# Altium PCB PCB2.PcbDoc
Units mil, origin at the board's own origin, x right, y up, seen from the top; angles counter-clockwise.
Board outline 3937.01 x 3149.61 mil, 2 copper layers (Top Layer, Bottom Layer); 32 components, 20 nets, 109 pads, 54 vias.
Unrouted connection lines stored in the file: 5.
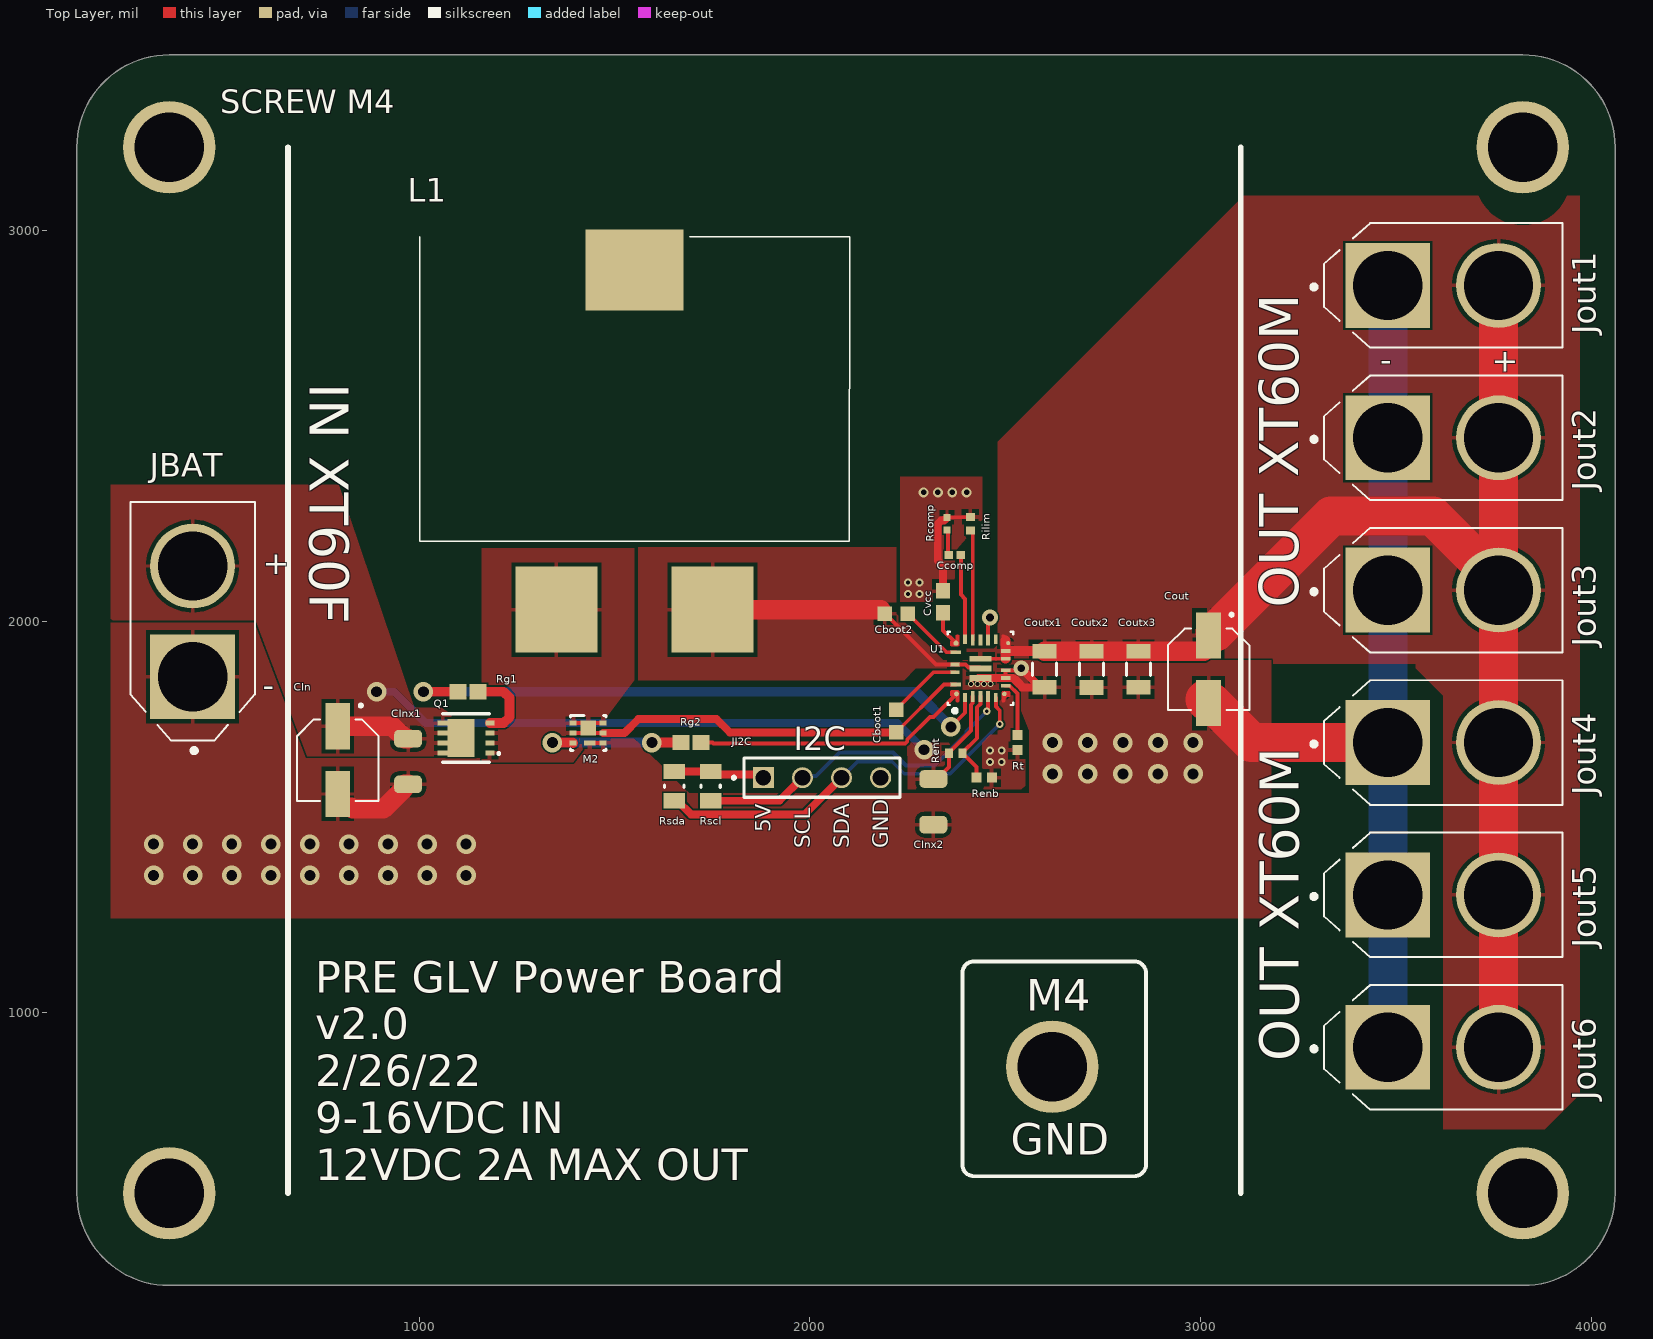
[diagram p0: Top Layer view]
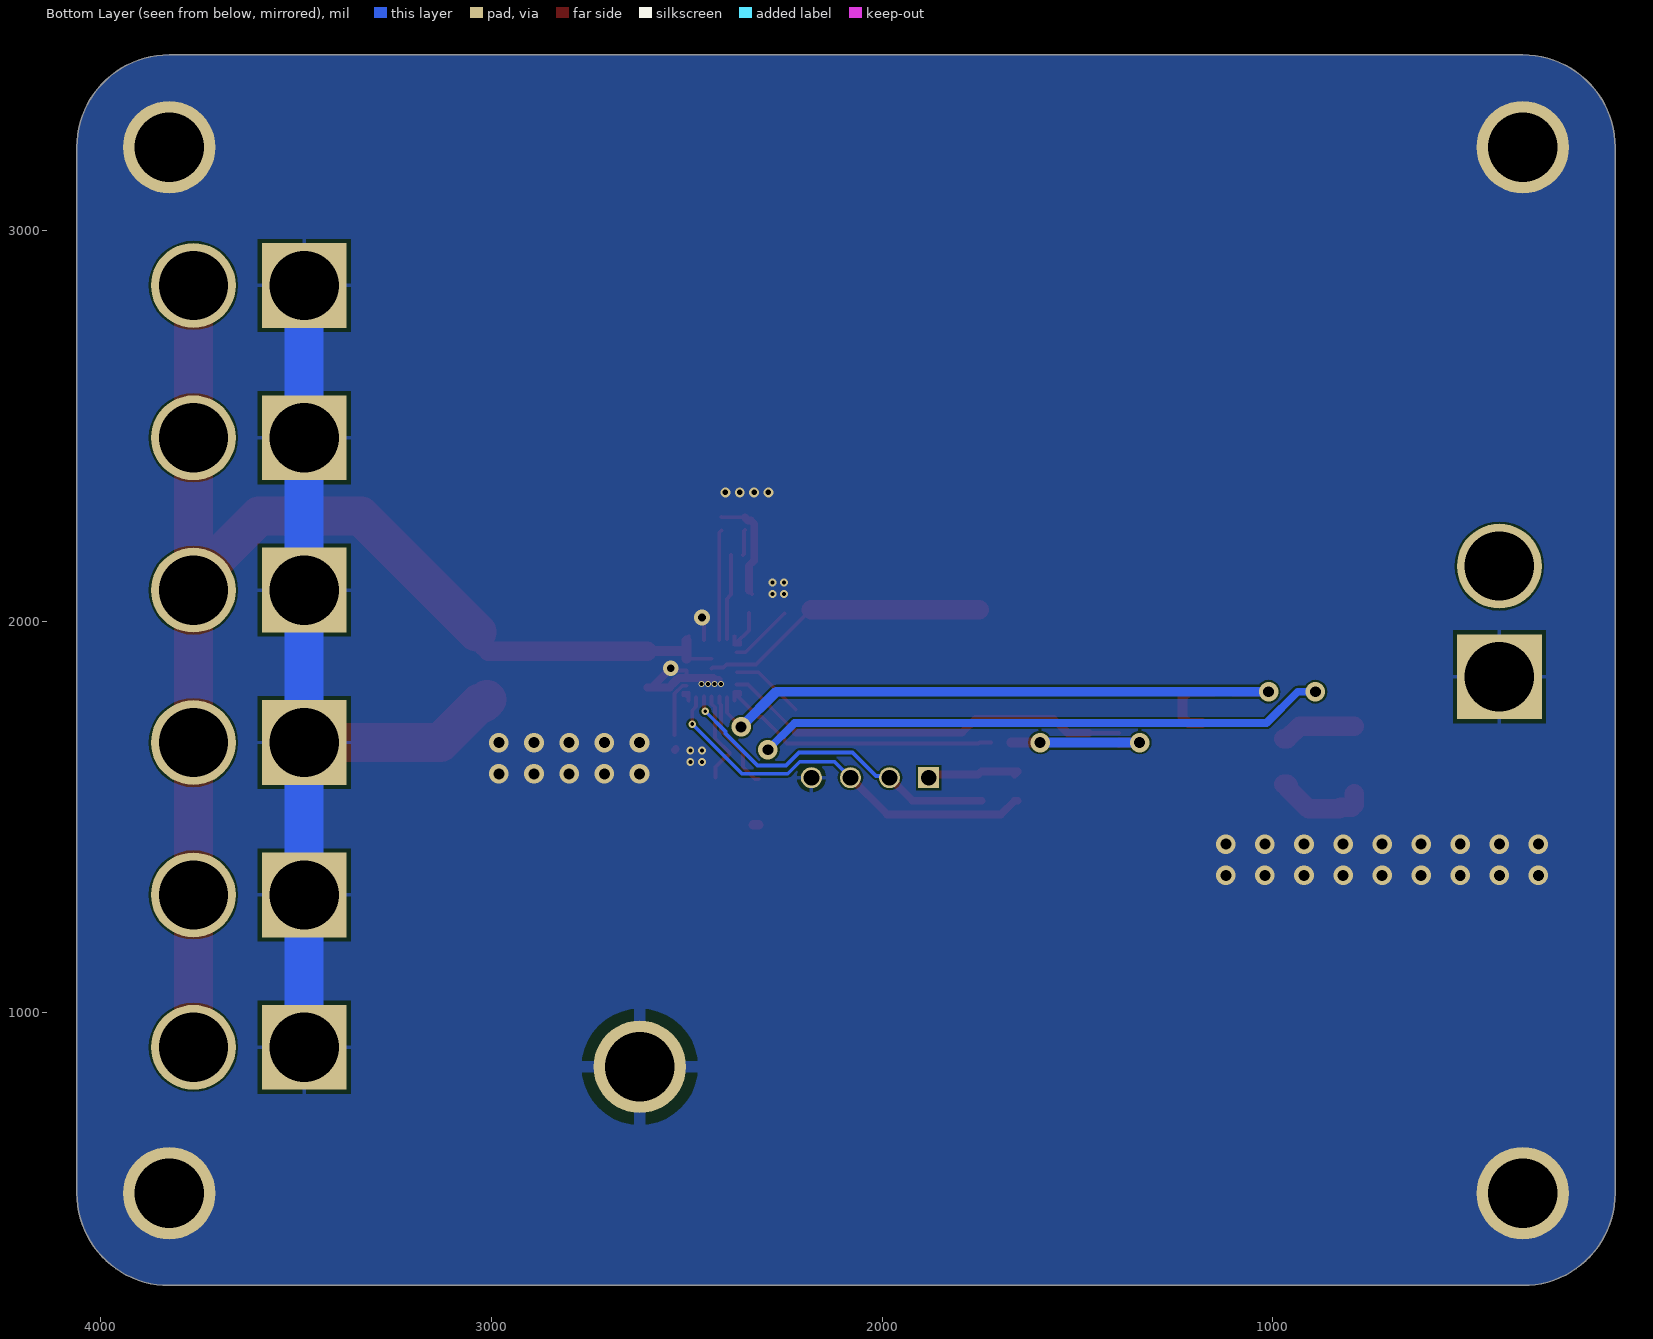
[diagram p1: Bottom Layer view, seen from below]

## Layer stack, top to bottom
Top Solder: solder mask 0.4, Solder Resist, Dk 3.5
Top Layer: signal copper 1.4
Dielectric 1: dielectric 12.6, FR-4, Dk 4.8
Bottom Layer: signal copper 1.4
Bottom Solder: solder mask 0.4, Solder Resist, Dk 3.5

## Board outline
123.7,536.61 123.7,3213.78 cw(c359.92,3213.78) 359.92,3450 3824.49,3450 cw(c3824.49,3213.78) 4060.71,3213.78 4060.71,536.61 cw(c3824.49,536.61) 3824.49,300.39 359.92,300.39 cw(c359.92,536.61)

## Design rules (kind name [scope] priority, off if disabled: settings)
Clearance Clearance_2 [(InNet('VCC') AND InComponent('Q1'))] p1: gap=5 ignorepadtopadclearanceinfootprint=TRUE except(0: Arc-Hole Track-Hole SMDPad-Hole THPad-Hole Via-Hole Fill-Hole Poly-Hole Region-Hole Text-Hole)
Clearance [All] p2: gap=5 ignorepadtopadclearanceinfootprint=FALSE except(0: Arc-Hole Track-Hole SMDPad-Hole THPad-Hole Via-Hole Fill-Hole Poly-Hole Region-Hole Text-Hole; 7.87: Arc-THPad Track-THPad; 10: Arc-Via Track-Via SMDPad-Via THPad-Via; 19.68: THPad-THPad; 20: Via-Via)
PolygonConnect PolygonConnect_1 [All vs InNet('GND')] p1: thpad.connectstyle=Relief thpad.reliefconductorwidth=10 thpad.reliefentries=4 thpad.polygonreliefangle="90 Angle" thpad.airgapwidth=10 smdpad.connectstyle=Relief smdpad.reliefconductorwidth=10 smdpad.reliefentries=4 smdpad.polygonreliefangle="90 Angle" smdpad.airgapwidth=10 via.connectstyle=Direct via.reliefconductorwidth=10 via.reliefentries=4 via.polygonreliefangle="90 Angle" via.airgapwidth=10
PolygonConnect [All] p2: thpad.connectstyle=Relief thpad.reliefconductorwidth=10 thpad.reliefentries=4 thpad.polygonreliefangle="90 Angle" thpad.airgapwidth=10 smdpad.connectstyle=Relief smdpad.reliefconductorwidth=10 smdpad.reliefentries=4 smdpad.polygonreliefangle="90 Angle" smdpad.airgapwidth=10 via.connectstyle=Direct via.reliefconductorwidth=10 via.reliefentries=4 via.polygonreliefangle="90 Angle" via.airgapwidth=10
RoutingVias [All] p1: holewidth=28 width=50 viastyle="Through Hole" minholewidth=5 minwidth=10 maxholewidth=28 maxwidth=50
SolderMaskExpansion [All] p1: expansion=4 istentingtop=FALSE
Width [All] p1: maxlimit=100 minlimit=10 preferedwidth=20 minimp=50.000000 maximp=50.000000 favimp=50.000000
30 further rules are at their usual default settings.

## Components (designator, comment, footprint, x,y, rotation, side; value= is the part's Value field where it differs from the comment)
Cboot1 "EMK107B7104KA-T" CAPC1608X90N#1 2220.71,1745 r90 top
Cboot2 "EMK107B7104KA-T" CAPC1608X90N#1 2220.71,2020 r180 top
Ccomp "GRM155R71C472KA01D" CAPC1005X55X25LL05T10 2370.71,2170 r0 top
CIn "20SVF56M" CAP_20SVF56M 791.41,1645 r270 top (schematic designator Cin)
CInx1 "GRM31CR71E475KA88L" CAP3216X125N 971.41,1641.54 r270 top (schematic designator Cinx1)
CInx2 "GRM31CR71E475KA88L" CAP3216X125N 2315.71,1538.3 r270 top (schematic designator Cinx2)
Cout "20SVF56M" CAP_20SVF56M 3020.13,1877.48 r270 top
Coutx1 "C2012X7S1E106K125AC" FP-C2012-125-IPC_A 2600.71,1877.48 r270 top
Coutx2 "C2012X7S1E106K125AC" FP-C2012-125-IPC_A 2720.71,1877.2 r270 top
Coutx3 "C2012X7S1E106K125AC" FP-C2012-125-IPC_A 2840.71,1877.48 r270 top
Cvcc "C1608X6S1C475K080AC" CAPC1608X90N#2 2340.71,2050 r270 top
JBAT "XT60-M" AMASS_XT60-M 420,2000 r90 top
JI2C "TSW-104-26-F-S" SAMTEC_TSW-104-26-F-S 1880.71,1600 r0 top
Jout1 "XT60-M" AMASS_XT60-M 3620.71,2860 r0 top
Jout2 "XT60-M" AMASS_XT60-M 3620.71,2470 r0 top
Jout3 "XT60-M" AMASS_XT60-M 3620.71,2080 r0 top
Jout4 "XT60-M" AMASS_XT60-M 3620.71,1690 r0 top
Jout5 "XT60-M" AMASS_XT60-M 3620.71,1300 r0 top
Jout6 "XT60-M" AMASS_XT60-M 3620.71,910 r0 top
L1 "PQ2614BLA-100K" PQ2614BLA100K 1551.89,2507.48 r0 top (schematic designator L?)
M2 "CSD16301Q2" DQK0006C 1432.32,1714.41 r0 top
Q1 "CSD17577Q3A" Q3A 1119.68,1701.61 r180 top
Rcomp "CRCW040247K5FKTD" RESC1005X40X25LL05T05 2350.71,2250 r270 top
Renb "CRCW0402100KFKTD" RESC1005X40X25ML05T05 2445.71,1600 r180 top
Rent "CRCW0402634KFKED" RESC1005X40N 2373.23,1662.48 r180 top
Rg1 "RC0603FR-071RL" RESC1608X55N 1125.12,1820 r180 top
Rg2 "RC0603FR-071RL" RESC1608X55N 1695.12,1690 r0 top
Rilim "RMCF0402FT21K0" RESC1005X40N 2410.71,2250 r90 top
Rscl "CRCW08054K70FKEA" FP-CRCW0805-e3-IPC_B 1745.73,1578.45 r270 top
Rsda "CRCW08054K70FKEA" FP-CRCW0805-e3-IPC_B 1652.72,1578.45 r270 top
Rt "CRCW040266K5FKED" RESC1005X40X25ML05T05 2530.71,1690 r90 top
U1 "TPS55288QRPMRQ1" RPM0026A-MFG 2436.24,1879.74 r90 top

## Footprints (in the part's own frame and the unit in brackets; to place one, negate y for a bottom-side part, rotate by r counter-clockwise, add the part's x,y. Pads: shape width x height; smd on the part's side, far side on the other; paste and mask are expansions set on the pad)
AMASS_XT60-M [mm]
  rect 5.516x5.516 hole 4.5: 1(-3.6,0)
  round 5.516 hole 4.5: 2(3.6,0)
  silkscreen extent -8.55,-4.05 7.75,4.05
CAP3216X125N [mm]
  rrect54% 1.15x1.82 smd: 1(-1.485,0) 2(1.485,0)
CAP_20SVF56M [mm]
  rect 3x1.6 smd: 1(-2.2,0) 2(2.2,0)
  silkscreen extent -3.65,-2.65 2.65,2.65, body extent -3,-2.65 3,2.65, height 5.9
CAPC1005X55X25LL05T10 [mm] "Chip Capacitor, 2-Leads, Body 1.00x0.50mm, IPC High Density"
  rect 0.56x0.52 smd: 1(-0.39,0) 2(0.39,0)
  body extent -0.53,-0.28 0.53,0.28, height 0.55
CAPC1608X90N#1 [mm]
  rect 0.95x0.93 smd: 1(-0.738,0) 2(0.738,0)
  body extent -0.8,-0.4 0.8,0.4, height 0.9
CAPC1608X90N#2 [mm]
  rect 1.01x0.93 smd: 1(-0.709,0) 2(0.709,0)
  body extent -0.8,-0.4 0.8,0.4, height 0.9
DQK0006C [mm]
  rect 0.45x0.3 smd paste+0 mask+0.051: 1(-0.975,0.65) 2(-0.975,0) 3(-0.975,-0.65) 4(0.975,-0.65) 5(0.975,0) 6(0.975,0.65)
  rect 0.75x0.3 smd paste-0.362 mask+0.051: 7(0.095,-0.65)
  rect 1x0.95 smd paste-0.487 mask+0.051: 8(0,0.325)
  silkscreen extent -1.15,-1.15 1.15,1.15, body extent 0,0 0.25,0.25, height 0.25
FP-C2012-125-IPC_A [mm]
  rect 0.956x1.556 smd paste+0 mask+0: 1(-1.175,0) 2(1.175,0)
  silkscreen extent -0.4,-0.78 0.4,0.78, body extent -2.15,-1.28 2.15,1.28, height 0.25
FP-CRCW0805-e3-IPC_B [mil]
  rect 39.63x55.44 smd paste+0 mask+0: 1(-37.44,0) 2(37.44,0)
  silkscreen extent -3,-25 3,25, body extent -67,-38 67,38, height 10
PQ2614BLA100K [mm]
  rect 5.33x5.59 smd: 1(-5.1,-12.128) 3(5.05,-12.128)
  rect 6.35x5.28 smd: 2(-0.025,9.947)
  silkscreen extent -13.98,-7.67 13.98,12.13
Q3A [mm]
  rect 0.6x0.3 smd: 1(-1.55,0.975) 2(-1.55,0.325) 3(-1.55,-0.325) 4(-1.55,-0.975)
  rect 0.635x0.3 smd: 5(1.532,-0.975) 6(1.532,-0.325) 7(1.532,0.325) 8(1.532,0.975)
  rect 1.775x2.45 smd: 9(0.327,0)
  silkscreen extent -2.16,-1.58 1.5,1.58, body extent -1.65,-1.66 1.65,1.66, height 0.9
RESC1005X40N [mm]
  rect 0.51x0.6 smd: 1(-0.445,0) 2(0.445,0)
  body extent -0.5,-0.25 0.5,0.25, height 0.4
RESC1005X40X25LL05T05 [mm] "Chip Resistor, 2-Leads, Body 1.00x0.50mm, IPC High Density"
  rect 0.45x0.45 smd: 1(-0.4,0) 2(0.4,0)
  body extent -0.53,-0.27 0.53,0.28, height 0.4
RESC1005X40X25ML05T05 [mm] "Chip Resistor, 2-Leads, Body 1.00x0.50mm, IPC Low Density"
  rect 0.65x0.65 smd: 1(-0.5,0) 2(0.5,0)
  body extent -0.53,-0.27 0.53,0.28, height 0.4
RESC1608X55N [mm]
  rect 1.1x1 smd: 1(-0.65,0) 2(0.65,0)
  body extent -0.8,-0.4 0.8,0.4, height 0.55
RPM0026A-MFG [mm]
  round 0.306 smd paste+0 mask+0: 1(-1.661,1.555)
  rect 0.6x0.25 smd paste+0 mask+0: 2(-1.9,1) 6(-1.9,-1) 14(1.9,-1) 18(1.9,1)
  rect 0.725x0.25 smd paste+0 mask+0: 3(-1.837,0.5) 4(-1.837,0) 5(-1.837,-0.5) 15(1.837,-0.5) 16(1.837,0) 17(1.837,0.5)
  round 0.29 smd paste+0 mask+0: 7(-1.661,-1.554)
  rect 0.25x0.625 smd paste+0 mask+0: 8(-1.125,-1.637) 9(-0.625,-1.637) 10(-0.125,-1.637) 11(0.625,-1.637) 12(1.125,-1.637)
  round 0.259 smd paste+0 mask+0: 13(1.644,-1.805)
  round 0.332 smd paste+0 mask+0: 19(1.641,1.591)
  rect 0.25x0.675 smd paste+0 mask+0: 20(1.05,1.613) 23(-1.05,1.613)
  rect 0.25x0.6 smd paste+0 mask+0: 21(0.25,1.65) 22(-0.25,1.65)
  rect 0.375x1.425 smd paste+0 mask+0: 24(-0.625,0) 25(0,0) 26(0.625,0)
  Top Layer region: -2.15,1.375 -2.2,1.425 -2.2,1.55 -2.15,1.6 -1.825,1.6 -1.825,1.9 -1.775,1.95 -1.475,1.95 -1.425,1.9 -1.425,1.425 -1.475,1.375
  Top Layer region: 2.2,1.425 2.2,1.425 2.2,1.55 2.15,1.6 1.825,1.6 1.825,1.9 1.775,1.95 1.475,1.95 1.425,1.9 1.425,1.425 1.475,1.375 2.15,1.375
  Top Layer region: -2.15,-1.599 -2.2,-1.549 -2.2,-1.424 -2.15,-1.374 -1.55,-1.374 -1.5,-1.424 -1.5,-1.899 -1.55,-1.949 -1.8,-1.949 -1.85,-1.899 -1.85,-1.599
  Top Layer region: 2.15,-1.599 2.2,-1.549 2.2,-1.424 2.15,-1.374 1.55,-1.374 1.5,-1.424 1.5,-1.899 1.55,-1.949 1.8,-1.949 1.85,-1.899 1.85,-1.599
  silkscreen extent -2.87,-2.12 2.37,2.12, body extent 0,0 0.25,0.25, height 0.25
SAMTEC_TSW-104-26-F-S [mm]
  rect 1.37x1.37 hole 1.02: 01(0,0)
  round 1.37 hole 1.02: 02(2.54,0) 03(5.08,0) 04(7.62,0)
  silkscreen extent -2.02,-1.27 8.89,1.27

## Part data
Cboot1 Cboot2: "Ceramic Multilayer Capacitor; Capacitor Type:General Purpose; Capacitance:0.1ÂµF; Capacitance Tolerance:Â± 10%; Voltage Rating:16VDC; Capacitor Dielectric Type:Multilayer Ceramic; Package/Case:0603; Termination Type:SMD ;RoHS Compliant: Yes", Package=None, Availability=Unavailable, MF="{'manufacturer': u'Taiyo Yuden'}", MP=EMK107B7104KA-T, Price=None
Ccomp: library part CMP-2008-04609-1, Manufacturer=Murata, Part Number=GRM155R71C472KA01D
CIn Cout JI2C: Package=None, Availability=Unavailable, Price=None
  CIn Cout: MF="{'manufacturer': u'Panasonic'}", MP=20SVF56M
  JI2C: MF="{'manufacturer': u'Samtec'}", MP=TSW-104-26-F-S
CInx1 CInx2: library part GRM31CR71H475KA12L, "Cap Ceramic 4.7uF 50V X7R 10% Pad SMD 1206 125C T/R", Package=None, Availability=Unavailable, MF="{'manufacturer': u'Murata'}", MP=GRM31CR71H475KA12L, Price=None
Coutx1 Coutx2 Coutx3: library part CMP-08246-000200-1, "CAP CER 10UF 25V X7S 0805"
Cvcc: "Cap Ceramic 4.7uF 16V X6S 10% SMD 0603 105Â°C Punched Paper T/R", Package=None, Availability=Unavailable, MF="{'manufacturer': u'TDK'}", MP=C1608X6S1C475K080AC, Price=None
JBAT Jout1 Jout2 Jout3 Jout4 Jout5 Jout6: "Plug; DC supply; XT60; male; PIN: 2; for cable; soldered; 30A; 500V", Package="Package Analog Devices", Availability=Unavailable, MF=AMASS, MP=XT60-M, Price=None, SnapEDA_Link=https://www.snapeda.com/parts/XT60-M/AMASS/view-part/2883912/?ref=snap
L1: "Inductor", Manufacturer_Name=Bourns, Mouser Part Number=652-PQ2614BLA-100K, Arrow Part Number=PQ2614BLA-100K, Arrow Price/Stock=https://www.arrow.com/en/products/pq2614bla-100k/bourns, Datasheet Link=https://www.mouser.com/datasheet/2/54/bourns_PQ2614BLA_BHA_datasheet-1159238.pdf, Height=16mm, Manufacturer_Part_Number=PQ2614BLA-100K, Mouser Price/Stock=https://www.mouser.co.uk/ProductDetail/Bourns/PQ2614BLA-100K?qs=1mbolxNpo8dMKwtGfSvUcA%3D%3D
M2 U1: "No Description Available", Mfr_Name="Texas Instruments", Copyright="Copyright (C) 2022 Ultra Librarian. All rights reserved.", RefDes=RefDes, Type=DEV
  M2: Manufacturer_Part_Number=CSD16301Q2
  U1: Digi-Key_Part_Number_1=296-TPS55288QRPMRQ1TR-ND, Digi-Key_Part_Number_2=296-TPS55288QRPMRQ1CT-ND, Digi-Key_Part_Number_3=296-TPS55288QRPMRQ1DKR-ND, Manufacturer_Part_Number=TPS55288QRPMRQ1
Q1: "MOSFET (N-Channel)", Manufacturer_Name="Texas Instruments", Mouser Part Number=595-CSD17577Q3A, Arrow Part Number=CSD17577Q3A, Arrow Price/Stock=https://www.arrow.com/en/products/csd17577q3a/texas-instruments, Datasheet Link=http://www.ti.com/lit/gpn/csd17577q3a, Manufacturer_Part_Number=CSD17577Q3A, Mouser Price/Stock=https://www.mouser.co.uk/ProductDetail/Texas-Instruments/CSD17577Q3A?qs=m%2F7bTylgptdTq6Yorh0Ysg%3D%3D
Rcomp: library part CMP-2002-00418-1, Manufacturer="Vishay Dale", Part Number=CRCW040247K5FKTD
Renb: library part CMP-1011-00736-2, Manufacturer="Vishay Dale", Part Number=CRCW0402100KFKTD
Rent: "RES, THICK FILM, 634K, 1%, 0.063W, 0402", Package=None, Availability=Unavailable, MF="{'manufacturer': u'Vishay Dale'}", MP=CRCW0402634KFKED, Price=None
Rg1 Rg2: "Resistor", Manufacturer_Name="YAGEO (PHYCOMP)", Mouser Part Number=603-RC0603FR-071RL, Arrow Part Number=RC0603FR-071RL, Arrow Price/Stock=https://www.arrow.com/en/products/rc0603fr-071rl/yageo, Datasheet Link=https://datasheet.datasheetarchive.com/originals/distributors/Datasheets_SAMA/902f9e387b938f871d31120f5fc1d65e.pdf, Height=0.55mm, Manufacturer_Part_Number=RC0603FR-071RL, Mouser Price/Stock=https://www.mouser.co.uk/ProductDetail/YAGEO/RC0603FR-071RL?qs=VU8sRB4EgwCpR02Ip%252BqS4Q%3D%3D
Rilim: "Resistor", Manufacturer_Name="Stackpole Electronics Inc.", Datasheet Link=https://www.seielect.com/catalog/sei-rmcf_rmcp.pdf, Height=0.4mm, Manufacturer_Part_Number=RMCF0402FT21K0
Rscl Rsda: library part CMP-2100-03615-2, "RES Thick Film, 4.7kΩ, 1%, 0.125W, 100ppm/°C, 0805", Case Code (Imperial)=0805, Case Code (Metric)=2012, Max Operating Temperature=155°C, Max Power Dissipation=125mW, Min Operating Temperature=-55°C, Package Quantity=10, Resistance=4.7kR, Temperature Coefficient=100ppm/°C, Tolerance=1%, Voltage Rating=150V, Case/Package=0805, Composition="Thick Film", Contact Plating=Tin, Depth=1.25mm, Features="Automotive AEC-Q200", Height=0.45mm, Lead Free="Lead Free", Length=2mm, Military Standard=Not, Number of Terminations=2, Packaging="Tape and Reel", Power Rating=125mW, Radiation Hardening=No, Termination=SMD/SMT, Voltage Rating (DC)=150V, Weight=0.000194oz, Width=1.25mm
Rt: library part CMP-2002-00162-1, Manufacturer="Vishay Dale", Part Number=CRCW040266K5FKED

## Free pads (board coordinates)
  round 236.22 hole 177.17: 2(359.92,536.61) 2(359.92,3213.78) 2(2620,860) 2(3824.49,536.61) 2(3824.49,3213.78)

## Via types
v1: diameter 50, hole 28, Top Layer to Bottom Layer, 34 vias
v2: diameter 20, hole 10, Top Layer to Bottom Layer, 10 vias
v3: diameter 25, hole 14, Top Layer to Bottom Layer, 4 vias
v4: diameter 15, hole 10, Top Layer to Bottom Layer, 4 vias
v5: diameter 40, hole 20, Top Layer to Bottom Layer, 2 vias

## Nets (pads, with @x,y where several pads share a name; then routed paths per layer and width w, separated by ;. In a path a pad name is that pad's centre, name@x,y a point inside that pad or via, vN(x,y) a via of type N, cw(c..) or ccw(c..) an arc to the next point about the centre after c; other vN are vias at no path point)
GND: CIn.2 CInx1.2 CInx2.2 Cout.2 Coutx1.2 Coutx2.2 Coutx3.2 Cvcc.1 JBAT.1 JI2C.04 Jout1.1 Jout2.1 Jout3.1 Jout4.1 Jout5.1 Jout6.1 M2.4 M2.7 pad.2 Rcomp.1 Renb.1 Rilim.2 Rt.1 U1.7 U1.9 U1.10 U1.15 U1.24 | length 3652
  Top Layer w10: M2.7 M2.4 ; Cvcc.1@2332.79,2070 Cvcc.1 Cvcc.1@2340.71,2079.49 ; Rcomp.1 2351.59,2266.63 2409.82,2266.63 Rilim.2 ; v4(2412.38,1840) 2413.19,1840.81 2413.19,1852.75 2415.57,1855.14 U1.24@2431.42,1855.14 ; v4(2429.04,1840) 2429.04,1852.75 U1.24@2431.42,1855.14 ; v4(2445.71,1840) 2445.71,1852.75 U1.24@2443.33,1855.14 ; U1.15 2455.92,2005.22 v5(2460.71,2010) ; v4(2462.37,1840) 2462.37,1841.35 2459.29,1844.44 2459.29,1852.75 U1.24@2456.91,1855.14 ; 2497.41,1806.91 U1.7 ; v5(2540.71,1880) 2535.53,1874.82 U1.10 2500.71,1855.45 U1.9 ; 2553.46,1831.22 2529.55,1855.14 2519.46,1855.14 U1.9 ; U1.24@2431.42,1855.14 U1.24 U1.24@2443.33,1855.14 ; U1.24@2443.33,1855.14 U1.24@2456.91,1855.14 ; U1.24@2456.91,1855.14 U1.9
  Top Layer w20: Cvcc.1@2340.71,2079.49 2340.71,2142.17 2326.85,2156.03 2326.85,2249.32 2335.64,2258.11 2343.07,2258.11 Rcomp.1 ; U1.24@2431.42,1855.14 2431.74,1855.45 2500.71,1855.45 2519.15,1855.45 2519.46,1855.14 2531.06,1843.54 2531.06,1843.06 2542.9,1831.22 2553.46,1831.22 Coutx1.2@2588.9,1831.22 ; Rt.1@2527.91,1673.11 Rt.1 ; v5(2540.71,1880) 2540.71,1879.41 Coutx1.2@2588.9,1831.22 ; Coutx1.2 Coutx1.2@2588.9,1831.22
  Top Layer w25: CInx2.2 CInx2.2@2328.9,1479.83
  Top Layer w50: CIn.2 791.41,1530.83 797.9,1524.33 825.46,1524.33 829.79,1520 908.34,1520 960.58,1572.24 960.58,1580.71 962.94,1583.07 CInx1.2 ; Cout.2@3013.64,1820 3020.13,1813.5 Cout.2
  Top Layer w100: Cout.2@3011.08,1799.92 Cout.2 ; Cout.2@3029.58,1790.87 3130.45,1690 Jout4.1
  Bottom Layer w100: Jout6.1 Jout5.1 Jout4.1 Jout3.1 Jout2.1 Jout1.1
  other v1: 320,1350 420,1350 520,1350 620,1350 720,1350 820,1350 920,1350 1020,1350 1120,1350 320,1430 420,1430 520,1430 620,1430 720,1430 820,1430 920,1430 1020,1430 1120,1430 2620.71,1610 2710.71,1610 2800.71,1610 2890.71,1610 2980.71,1610 2620.71,1690 2710.71,1690 2800.71,1690 2890.71,1690 2980.71,1690
  other v2: 2460.71,1640 2490.71,1640 2460.71,1670 2490.71,1670 2250.71,2070 2280.71,2070 2250.71,2100 2280.71,2100
  other v3: 2290.71,2330 2327.37,2330 2364.04,2330 2400.71,2330
NetCboot1_1: Cboot1.1 L1.1 M2.1 M2.2 M2.5 M2.6 M2.8 Q1.1 Q1.2 Q1.3 U1.23 | length 1135.4
  Top Layer w10: M2.2 M2.5 ; M2.1 M2.6 ; Cboot1.1 2220.71,1716.34 2342.77,1838.4 U1.23
  Top Layer w20: M2.5 1525.12,1714.41 1560.71,1750 1760.71,1750 1794.76,1715.94 Cboot1.1
NetCboot1_2: Cboot1.2 U1.22 | length 190.5
  Top Layer w10: Cboot1.2 2220.71,1774.45 2316.16,1869.9 U1.22
NetCboot2_1: Cboot2.1 U1.20 | length 164
  Top Layer w10: Cboot2.1 2250.16,2020 2349,1921.16 2372.68,1921.16 U1.20
NetCboot2_2: Cboot2.2 L1.3 U1.21 U1.25 | length 747.8
  Top Layer w10: Cboot2.2@2181.65,2030 2182.05,2030 2322.46,1889.58 U1.21 2398.09,1889.58 2405.55,1882.12 2433.86,1882.12 U1.25
  Top Layer w50: L1.3 Cboot2.2@2181.65,2030
NetCcomp_1: Ccomp.1 Rcomp.2 | length 66.2
  Top Layer w10: Rcomp.2 2353.03,2231.93 2353.03,2172.32 Ccomp.1
NetCcomp_2: Ccomp.2 U1.18 | length 219.9
  Top Layer w10: Ccomp.2 2386.06,2068.42 2396.87,2057.62 U1.18
NetCout_1: Cout.1 Coutx1.1 Coutx2.1 Coutx3.1 Jout1.2 Jout2.2 Jout3.2 Jout4.2 Jout5.2 Jout6.2 U1.11 U1.12 U1.13 U1.26 | length 3563.3
  Top Layer w10: U1.26 U1.11 ; 2499.19,1952.58 2500.71,1951.06 2501.65,1950.12 2501.65,1924.11 U1.12@2501.57,1924.03
  Top Layer w25: U1.11 U1.12 2500.71,1951.06 ; U1.12@2501.57,1924.03 2600.42,1924.03 Coutx1.1
  Top Layer w50: Coutx1.1 Coutx3.1 3007.34,1923.74 3020.13,1936.54 Cout.1
  Top Layer w100: Cout.1@3037.23,1973.15 3334.09,2270 3594.09,2270 3762.44,2101.64 Jout3.2 Jout2.2 Jout1.2 ; Jout6.2 Jout5.2 Jout4.2 Jout3.2@3762.44,2061.45
NetCvcc_2: Cvcc.2 U1.19 | length 94
  Top Layer w10: Cvcc.2 2340.71,1977.24 U1.19 2373.62,1945.17 U1.19@2372.38,1946.4
NetJI2C_01: JI2C.01 Rscl.1 Rsda.1 | length 245.8
  Top Layer w20: Rsda.1@1660.67,1607.94 Rsda.1 Rscl.1 1753.68,1607.94 1872.77,1607.94 JI2C.01
NetJI2C_02: JI2C.02 Rscl.2 U1.5 | length 871
  Top Layer w10: v2(2452.41,1770) 2452.41,1772.71 2455.92,1776.22 U1.5
  Top Layer w20: Rscl.2 1921.72,1541.02 JI2C.02
  Bottom Layer w10: JI2C.02 1985.42,1604.71 2015.35,1604.71 2075.64,1665 2212.51,1665 2245.93,1631.58 2318.99,1631.58 2400.71,1713.3 2400.71,1718.3 v2(2452.41,1770)
NetJI2C_03: JI2C.03 Rsda.2 U1.6 | length 1040.7
  Top Layer w10: U1.6 2475.69,1804.86 2475.69,1782.08 2485.71,1772.06 v2(2485.71,1737.02)
  Top Layer w20: Rsda.2 1660.63,1541.02 1695.44,1506.2 1986.91,1506.2 JI2C.03
  Bottom Layer w10: JI2C.03 2121.53,1640.83 2210.55,1640.83 2241.38,1610 2358.69,1610 v2(2485.71,1737.02)
NetM2_3: M2.3 Rg2.1 | length 392.5
  Top Layer w25: v1(1340.71,1690) 1392.76,1690 M2.3 ; v1(1595.12,1690) Rg2.1
  Bottom Layer w25: v1@1330.71,1690 v1(1340.71,1690) v1(1595.12,1690)
NetQ1_4: Q1.4 Rg1.1 | length 192.8
  Top Layer w25: Rg1.1 1216.06,1820 1230.71,1805.36 1230.71,1754.64 1216.06,1740 Q1.4
NetRenb_2: Renb.2 Rent.1 U1.4 | length 241.9
  Top Layer w10: Renb.2 2426.02,1627.2 2397.56,1655.67 2395.79,1655.67 2390.75,1660.71 Rent.1 2390.75,1664.25 2427.41,1700.91 2427.41,1780.36 2436.16,1789.11 2436.16,1807.32 U1.4
NetRg1_2: Rg1.2 U1.2 | length 1574.3
  Top Layer w10: v1(2360.71,1730) 2396.87,1766.16 U1.2
  Top Layer w25: v1(1010.71,1820) Rg1.2 Rg1.2@1100.71,1820
  Bottom Layer w25: v1(1010.71,1820) 2270.71,1820 v1(2360.71,1730) ; v1@2365.71,1735 v1@2370.71,1730
NetRg2_2: Rg2.2 U1.1 | length 710.6
  Top Layer w10: Rg2.2 1750.71,1690 1753.46,1687.24 2243.16,1687.24 2249.02,1693.1 2249.02,1697.35 2307.32,1755.66 2316.34,1755.66 U1.1
NetRilim_1: Rilim.1 U1.17 | length 283.3
  Top Layer w10: Rilim.1 2411.52,2232.48 2416.55,2227.44 U1.17
NetRt_2: Rt.2 U1.8 | length 143.9
  Top Layer w10: U1.8 2500.79,1835.37 2510.46,1835.37 2530.71,1815.12 Rt.2
VCC: CIn.1 CInx1.1 CInx2.1 JBAT.2 Q1.5 Q1.6 Q1.7 Q1.8 Rent.2 U1.3 | length 1913.8
  Top Layer w10: CInx2.1 2324.99,1596.76 2355.71,1627.48 Rent.2 2355.71,1664.25 2412.41,1720.95 2412.41,1786.57 2416.48,1790.64 2416.48,1807.32 U1.3
  Top Layer w50: CIn.1 931.33,1731.61 962.94,1700 CInx1.1
  Bottom Layer w20: v1(890.71,1820) 936.17,1820 1016.17,1740 2223.69,1740 v1(2292.11,1671.58)
pads on no net: L1.2 Q1.9 U1.14 U1.16

## Polygon pours and split planes (outlines as drawn)
NetCboot1_1 on Top Layer "NETCBOOT1_1_L01_P000" (solid, pour order 0): 1159.81,1640 1394.16,1640 1549.81,1850 1549.81,2187.82 1159.81,2187.82
NetCboot2_2 on Top Layer "NETCBOOT2_2_L01_P001" (solid, pour order 1): 1560.71,2190 2220.71,2190 2220.71,2020 2340.71,1900 2400.71,1900 2410.71,1890 2410.71,1870 2390.71,1870 2380.71,1880 2270.71,1880 2240.71,1850 1560.71,1850
GND on Top Layer "GND_L01_P002" (solid, pour order 2): 2440.71,2260 2440.71,2370 2230.71,2370 2230.71,2050 2370.71,2050 2370.71,2180
GND on Top Layer "GND_L01_P003" (solid, pour order 3): 2390.71,1825.25 2520.58,1825.25 2560.71,1720 2560.71,1560 1690.71,1560 1550.71,1700 1390.71,1700 1330.71,1640 1320.71,1650 710,1650 577.7,1996.99 210,1996.99 210,1240 3180.71,1240 3180.71,1900 2390.71,1900
GND on Top Layer "GND_L01_P004" (solid, pour order 4): 2480.71,1830 2530.71,1830 2530.71,1710 2550.71,1690 2550.71,1580 2540.71,1570 2440.71,1570 2440.71,1690 2460.71,1710 2480.71,1710
VCC on Top Layer "VCC_L01_P006" (solid, pour order 6): 210,2350 210,1996.99 581.77,1996.99 710,1650 1116.76,1650 1116.76,1739.33 1056.76,1779.33 986.76,1779.33 793.33,2350
VCC on Top Layer "VCC_L01_P007" (solid, pour order 7): 2250.71,1630 2250.71,1570 2380.71,1570 2380.71,1690 2250.68,1690 2247.93,1687.24
NetCout_1 on Top Layer "NETCOUT_1_L01_P012" (solid, pour order 12): 2400.71,1930 2405.71,1895 3550.71,1890 3550.71,1880 3620.71,1810 3620.71,700 3880.71,700 3970.71,790 3970.71,3090 3110.71,3090 2480.71,2460 2480.71,1940 2470.71,1930
GND on Bottom Layer "GND_L01_P015" (solid, pour order 15): 123.7,536.61 123.7,3213.78 cw(c359.92,3213.78) 359.92,3450 3824.49,3450 cw(c3824.49,3213.78) 4060.71,3213.78 4060.71,536.61 cw(c3824.49,536.61) 3824.49,300.39 359.92,300.39 cw(c359.92,536.61)

## Silkscreen, mask and mechanical layers (free items; w line width, h text height)
Top Overlay:
  lines w10: 2390,610 ccw(c2420,610) 2420,580 2830,580 ccw(c2830,610) 2860,610 2860,1100 ccw(c2830,1100) 2830,1130 2420,1130 ccw(c2420,1100) 2390,1100 2390,610
  lines w15: 663.75,536.61 663.75,3213.78 ; 3102.62,536.61 3102.62,3213.78
  text "SCREW M4" at 490,3300 h60
  text "-" at 3460,2640.01 h60
  text "+" at 3744.67,2639.29 h60
  text "IN XT60F" at 720,2610 h100 r270
  text "+" at 600,2120.14 h60
  text "OUT XT60M" at 3250,2034.88 h100 r90
  text "-" at 600,1806.68 h60
  text "I2C" at 1958.74,1669.84 h60
  text "5V" at 1900,1460 h40 r90
  text "SCL" at 2001.07,1420 h40 r90
  text "SDA" at 2100.5,1420 h40 r90
  text "GND" at 2200.29,1420 h40 r90
  text "M4" at 2553.35,1003.11 h80
  text "OUT XT60M" at 3250.71,874.88 h100 r90
  text "GND" at 2513.37,635 h80
  text "PRE GLV Power Board / v2.0 / 2/26/22 / 9-16VDC IN / 12VDC 2A MAX OUT" at 733.75,570 h80
Mechanical 1:
  the board outline again, w10
Mechanical 13:
  lines w8: 123.7,536.61 4060.71,536.61 ; 123.7,3213.78 4060.71,3213.78 ; 359.92,300.39 359.92,3450 ; 3824.49,300.39 3824.49,3450